# EAGLE board smart_container_v1.1_Master (EAGLE 9.5.0)
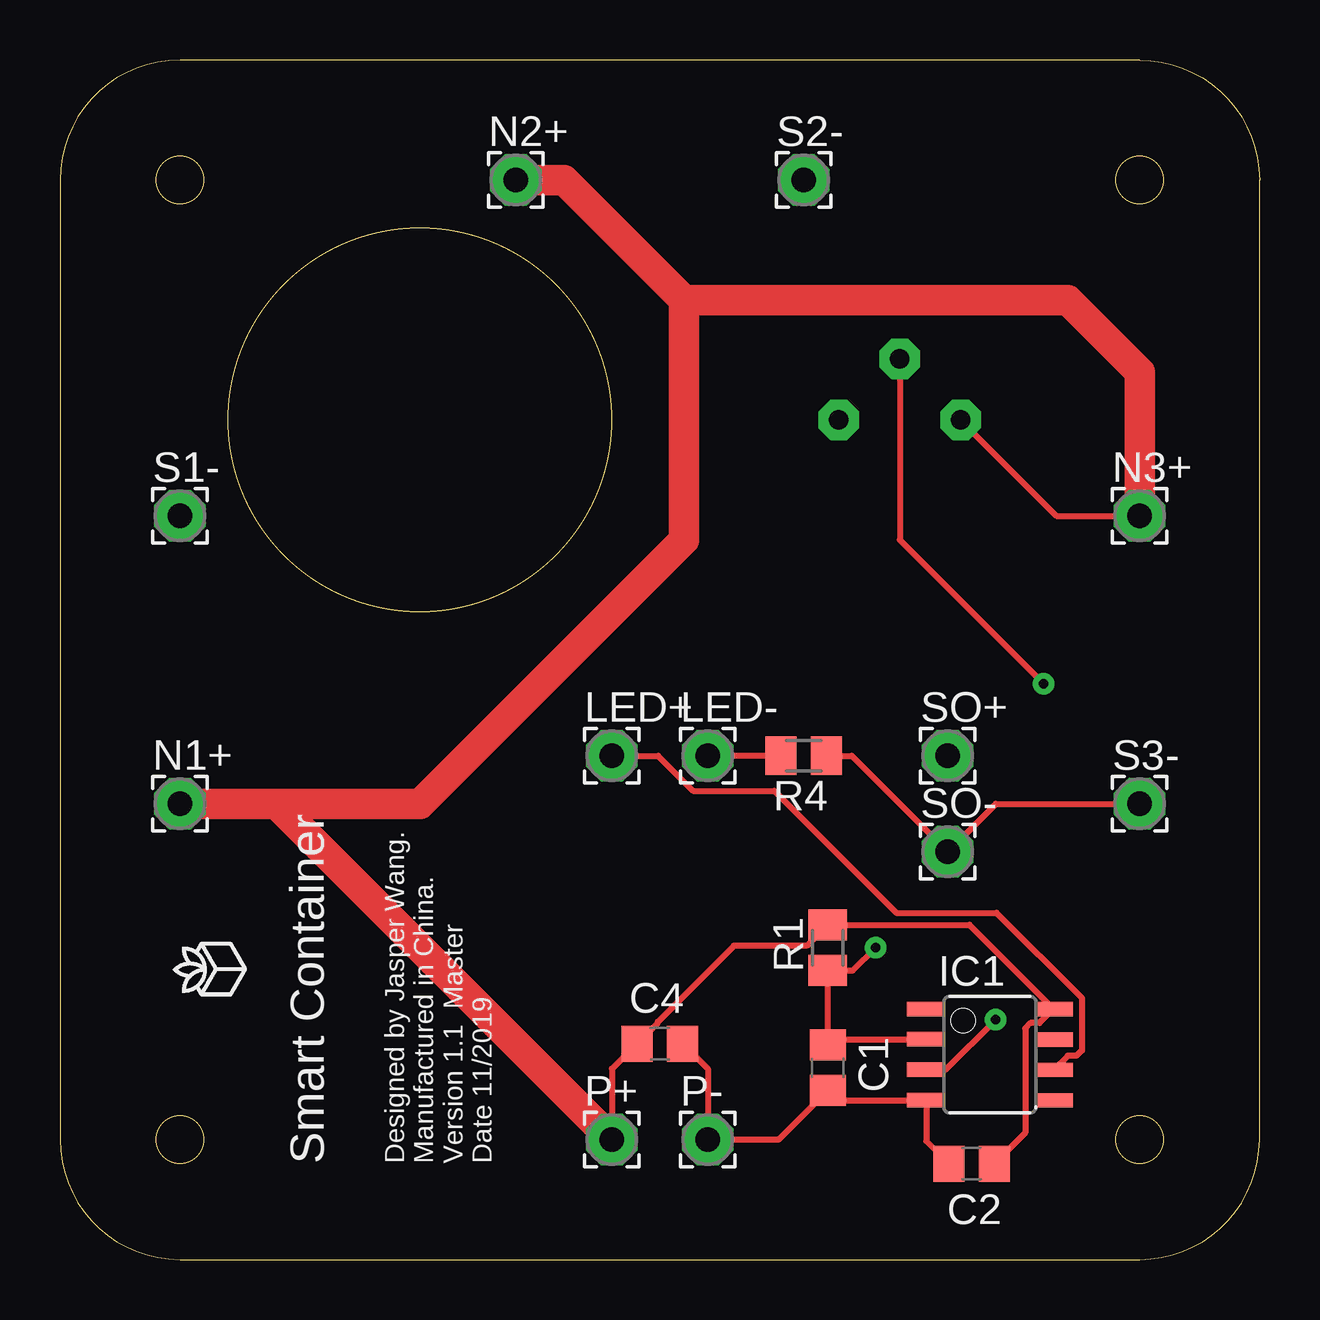
[diagram p0: board, top side]
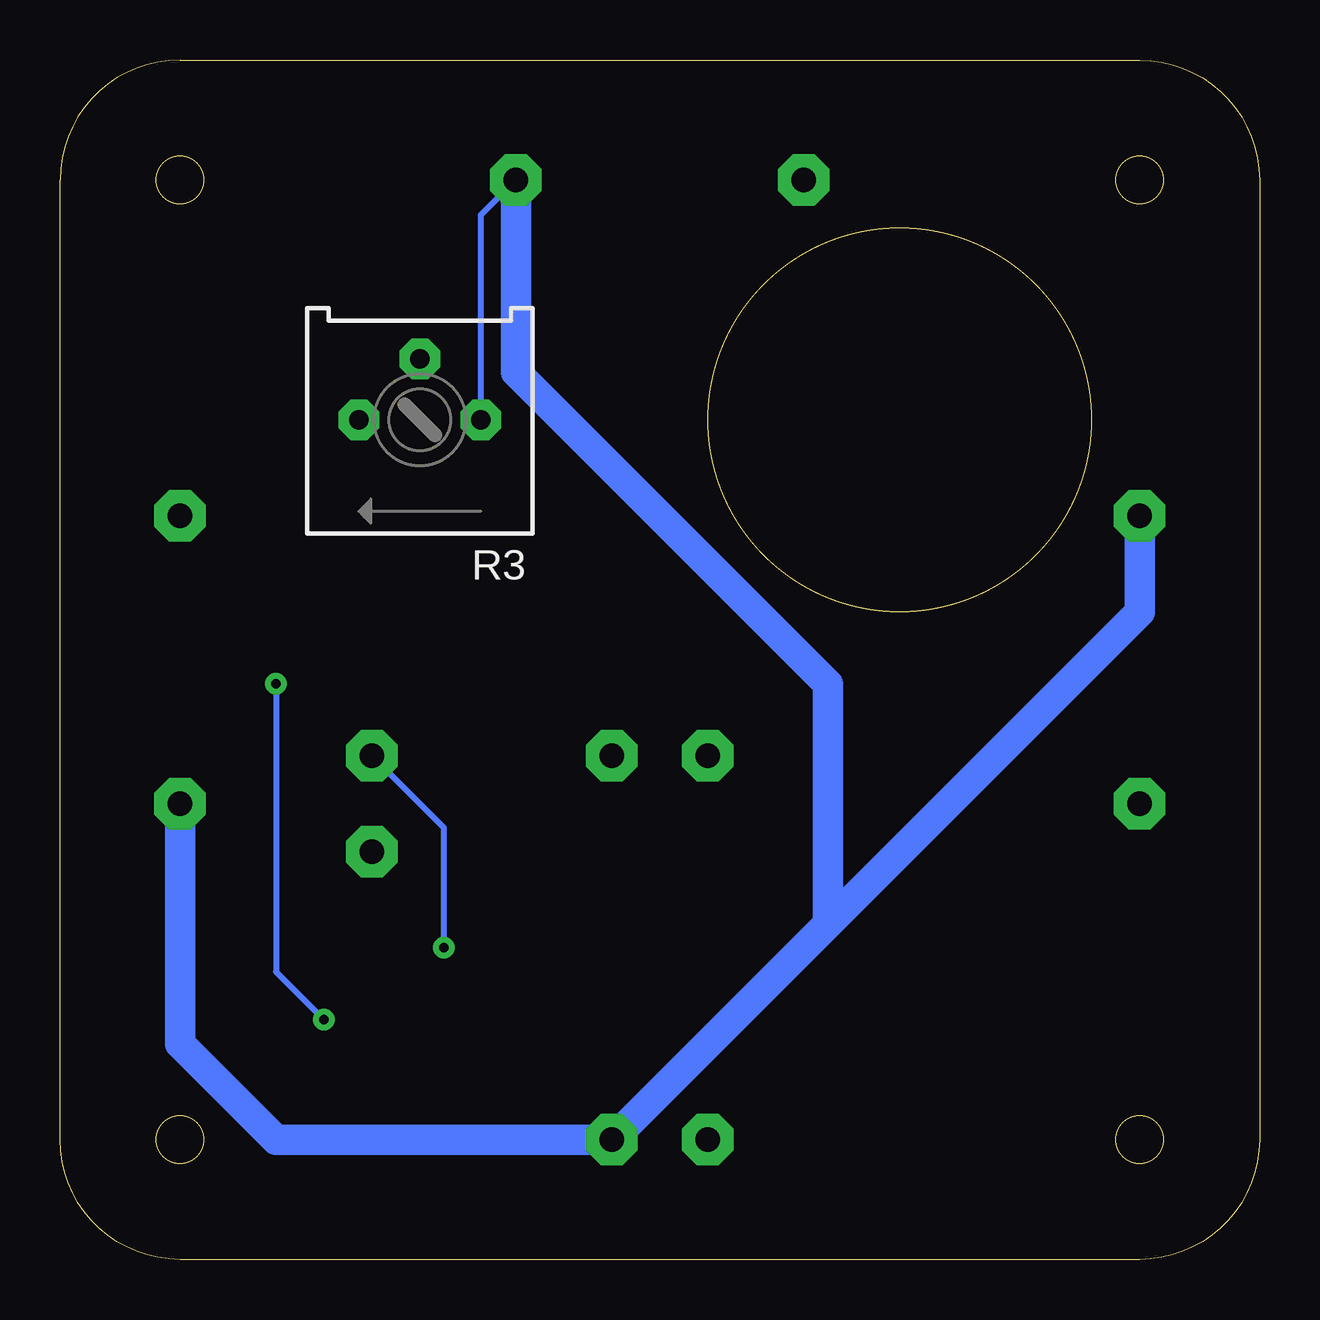
[diagram p1: board, bottom side, seen from below]

Size 50 x 50 mm. Coordinates in mm from the lower left corner, seen from the top.
Outline: 50,5 50,45 arc90 45,50 5,50 arc90 0,45 0,5 arc90 5,0 45,0 arc90 50,5
Outline: circle at 15,35 radius 8
Outline: circle at 45,45 radius 1
Outline: circle at 5,45 radius 1
Outline: circle at 5,5 radius 1
Outline: circle at 45,5 radius 1
Copper layers (1*16): Top 0.035mm / dielectric 1.5mm / Bottom 0.035mm
Design rules "SparkFun *": minimum track width 10mil, minimum drill 15mil, track to track 10mil, track to pad 10mil, pad to pad 10mil, via to via 10mil, smd to smd 8mil, copper to edge 10mil, drill to drill 10mil, minimum pad ring 12mil, minimum via ring 10mil, stop-mask expansion 4mil, vias tented up to drill 20mil, thermal gap 10mil

## Footprints (pad centres in the part's own frame; a part is rotated, then mirrored left to right if it is on the bottom)
C0805 = smd 1.3 x 1.5: 1 -0.95,0; 2 0.95,0
8S1 = smd 0.6 x 1.6: 1 -1.905,-2.654; 2 -0.645,-2.654; 3 0.625,-2.654; 4 1.895,-2.654; 5 1.905,2.654; 6 0.635,2.654; 7 -0.635,2.654; 8 -1.905,2.654
2,15/1,0 = drill 1.016 pad 2.159 octagon: 1 0,0
M0805 = smd 1.3 x 1.6: 1 -0.95,0; 2 0.95,0
3386P = drill 0.813 pad 1.676 octagon: 1 -2.54,0; 2 0,-2.54; 3 2.54,0

## Placement (x,y rotation side)
C1  0.1uF  [C0805]  32,8 270 top
C2  0.1uF  [C0805]  38,4 180 top
C4  0.1uF  [C0805]  25,9 0 top
IC1  TINY13-20SSU  [8S1]  38.76,8.54 270 top
LED+  [2,15/1,0]  23,21 0 top
LED-  [2,15/1,0]  27,21 0 top
N1+  [2,15/1,0]  5,19 0 top
N2+  [2,15/1,0]  19,45 0 top
N3+  [2,15/1,0]  45,31 0 top
P+  [2,15/1,0]  23,5 0 top
P-  [2,15/1,0]  27,5 0 top
R1  10k  [M0805]  32,13 90 top
R3  10k  [3386P]  35,35 180 bottom
R4  220  [M0805]  31,21 180 top
S1-  [2,15/1,0]  5,31 0 top
S2-  [2,15/1,0]  31,45 0 top
S3-  [2,15/1,0]  45,19 0 top
SO+  [2,15/1,0]  37,21 0 top
SO-  [2,15/1,0]  37,17 0 top

## Library data of the parts
C1 C2 C4 = resistor
IC1 = atmel; MPN: ATTINY13-20SSU; OC_FARNELL: 1455133; OC_NEWARK: 58M3771
LED+ LED- N1+ N2+ N3+ P+ P- S1- S2- S3- SO+ SO- = wirepad
R1 R4 = adafruit
R3 = bournsP

## Nets
GND: C1.2 C2.2 C4.2 IC1.4 P-.1 R3.1 R4.1 S1-.1 S2-.1 S3-.1 SO-.1
L0: IC1.6 LED+.1
N$2: LED-.1 R4.2
N$7: C1.1 IC1.2 R1.1 SO+.1
VCC: C2.1 C4.1 IC1.8 N1+.1 N2+.1 N3+.1 P+.1 R1.2 R3.3
VR0: IC1.3 R3.2

## Tracks (layer width: path | path; a pad name or v marks a point on that pad's centre or on a via)
GND
  Top 0.254: C4.2 27,7.95 P-.1 29.95,5 C1.2 32.41,6.64 IC1.4 36.11,4.94 C2.2 | S3-.1 39,19 SO-.1 33,21 R4.1
  Bottom 0.254: S2-.1 32.46,43.54 R3.1
  Bottom 1.27: S2-.1 31,37 18,24 18,14 | 18,14 P-.1 41,5 45,9 S3-.1 | 18,14 5,27 S1-.1
L0
  Top 0.254: LED+.1 24.93,21 26.39,19.54 29.78,19.54 34.86,14.46 39.04,14.46 42.59,10.9 42.59,8.72 42.37,8.49 42,8.49 IC1.6
N$2
  Top 0.254: R4.2 LED-.1
N$7  (via drill 0.38)
  Top 0.254: IC1.2 32.23,9.19 C1.1 R1.1 33.05,12.05 v34,13
  Bottom 0.254: v34,13 34,18 SO+.1
VCC
  Top 0.254: P+.1 23,7.95 C4.1 24.92,9.87 24.92,9.91 28.09,13.08 31.13,13.08 R1.2 37.91,13.95 IC1.8 40.83,9.86 40.46,9.86 40.23,9.63 40.23,5.28 C2.1 | R3.3 41.54,31 N3+.1
  Top 1.27: P+.1 9,19 | N1+.1 9,19 | 9,19 15,19 26,30 26,40 | N2+.1 21,45 26,40 | 26,40 42,40 45,37 N3+.1
VR0  (via drill 0.38)
  Top 0.254: R3.2 35,30 v41,24 | v39,10 36.91,7.92 IC1.3
  Bottom 0.254: v41,24 41,12 v39,10

## Text on the board
tPlace: Smart Container | Designed by Jasper Wang. / Manufactured in China. / Version 1.1 Master / Date 11/2019